# EAGLE board Proiect TSC v120 (EAGLE 9.7.0)
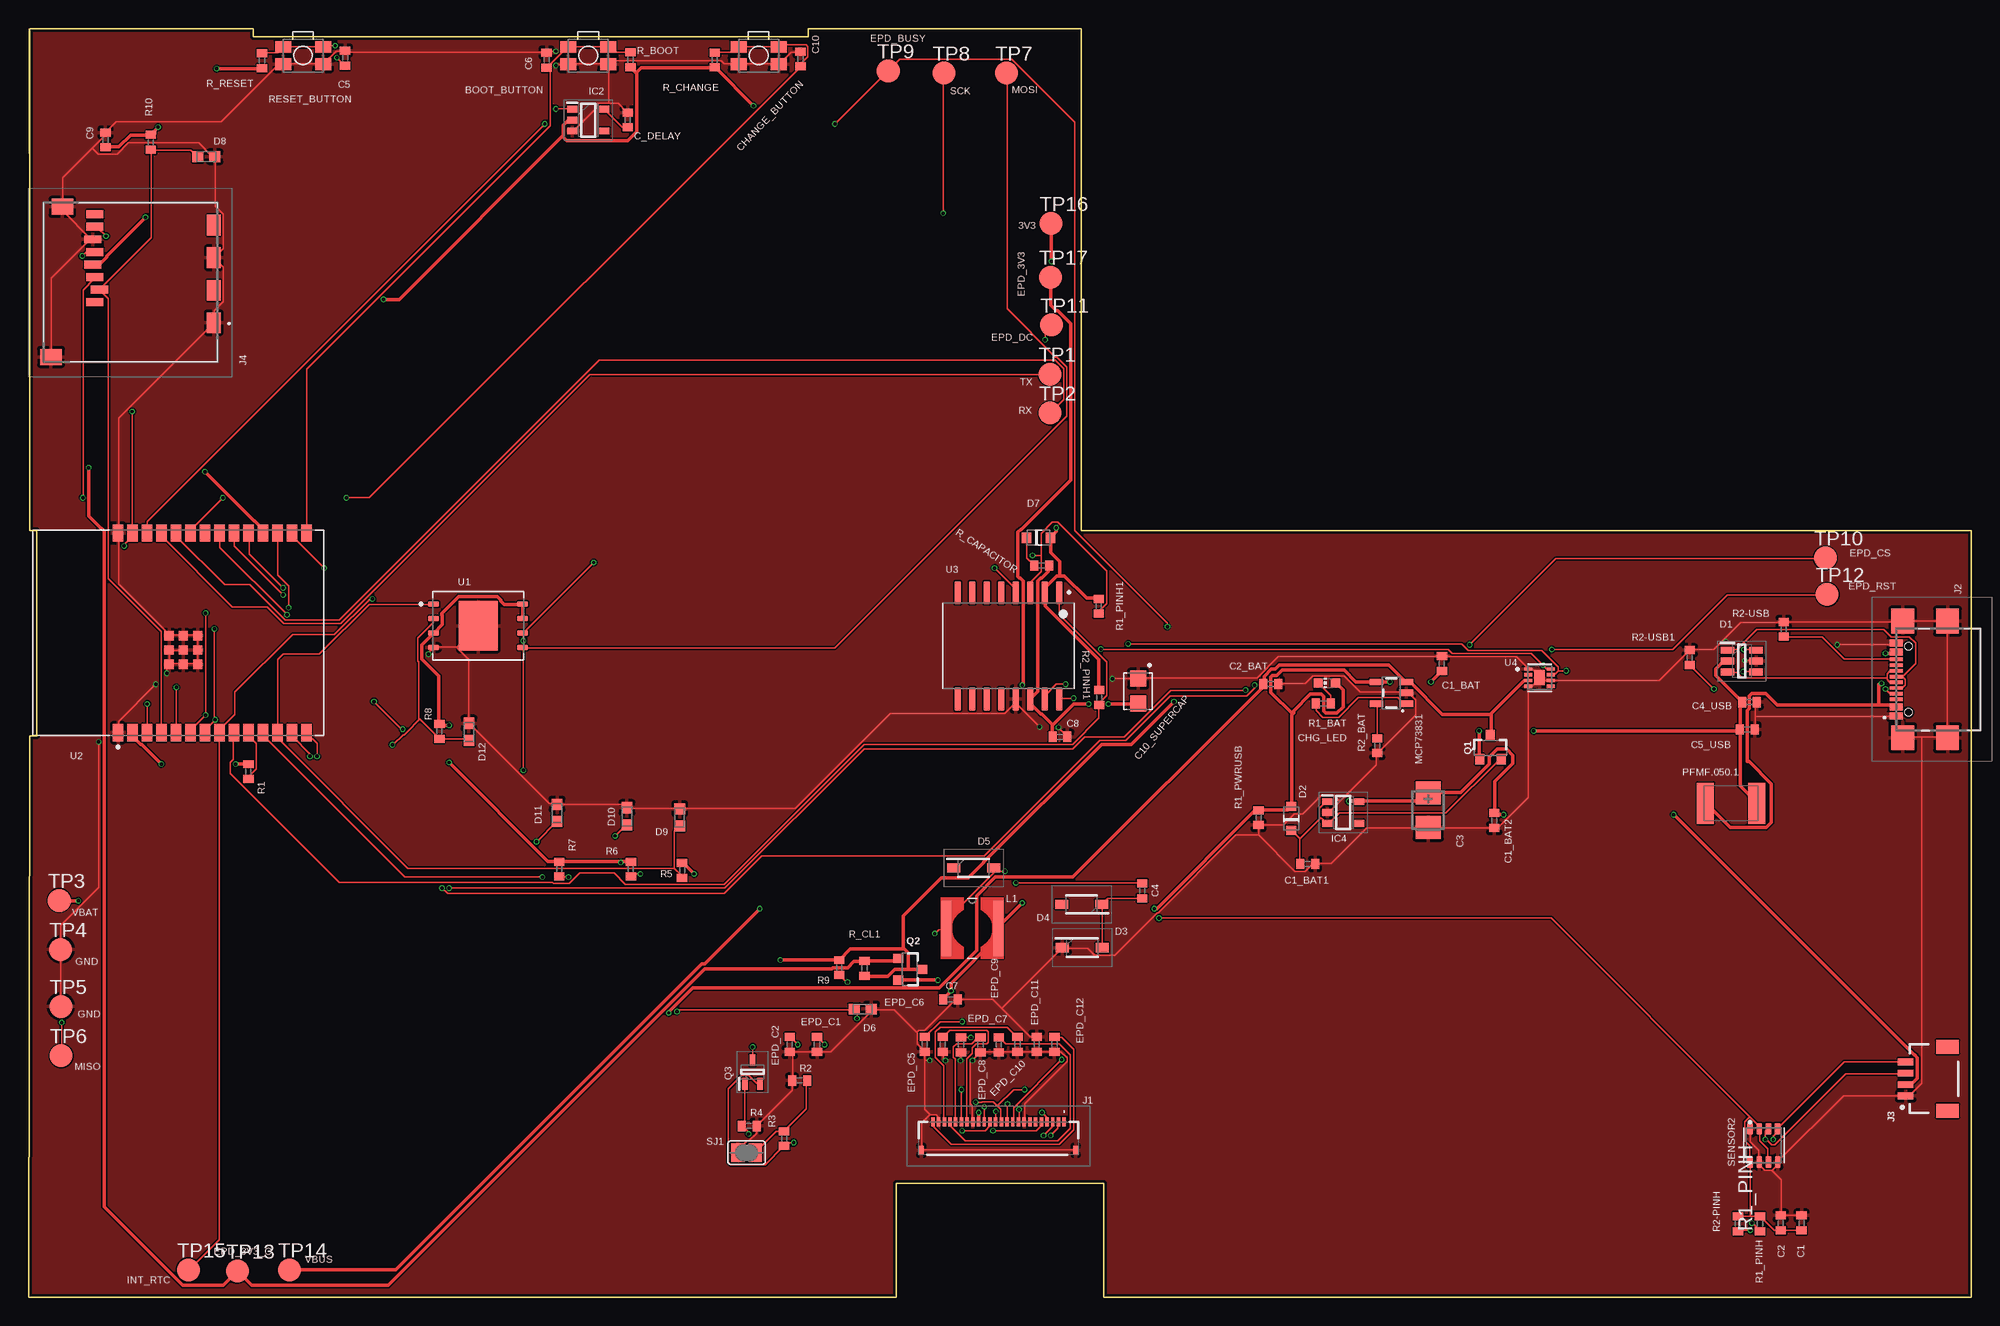
[diagram p0: board, top side]
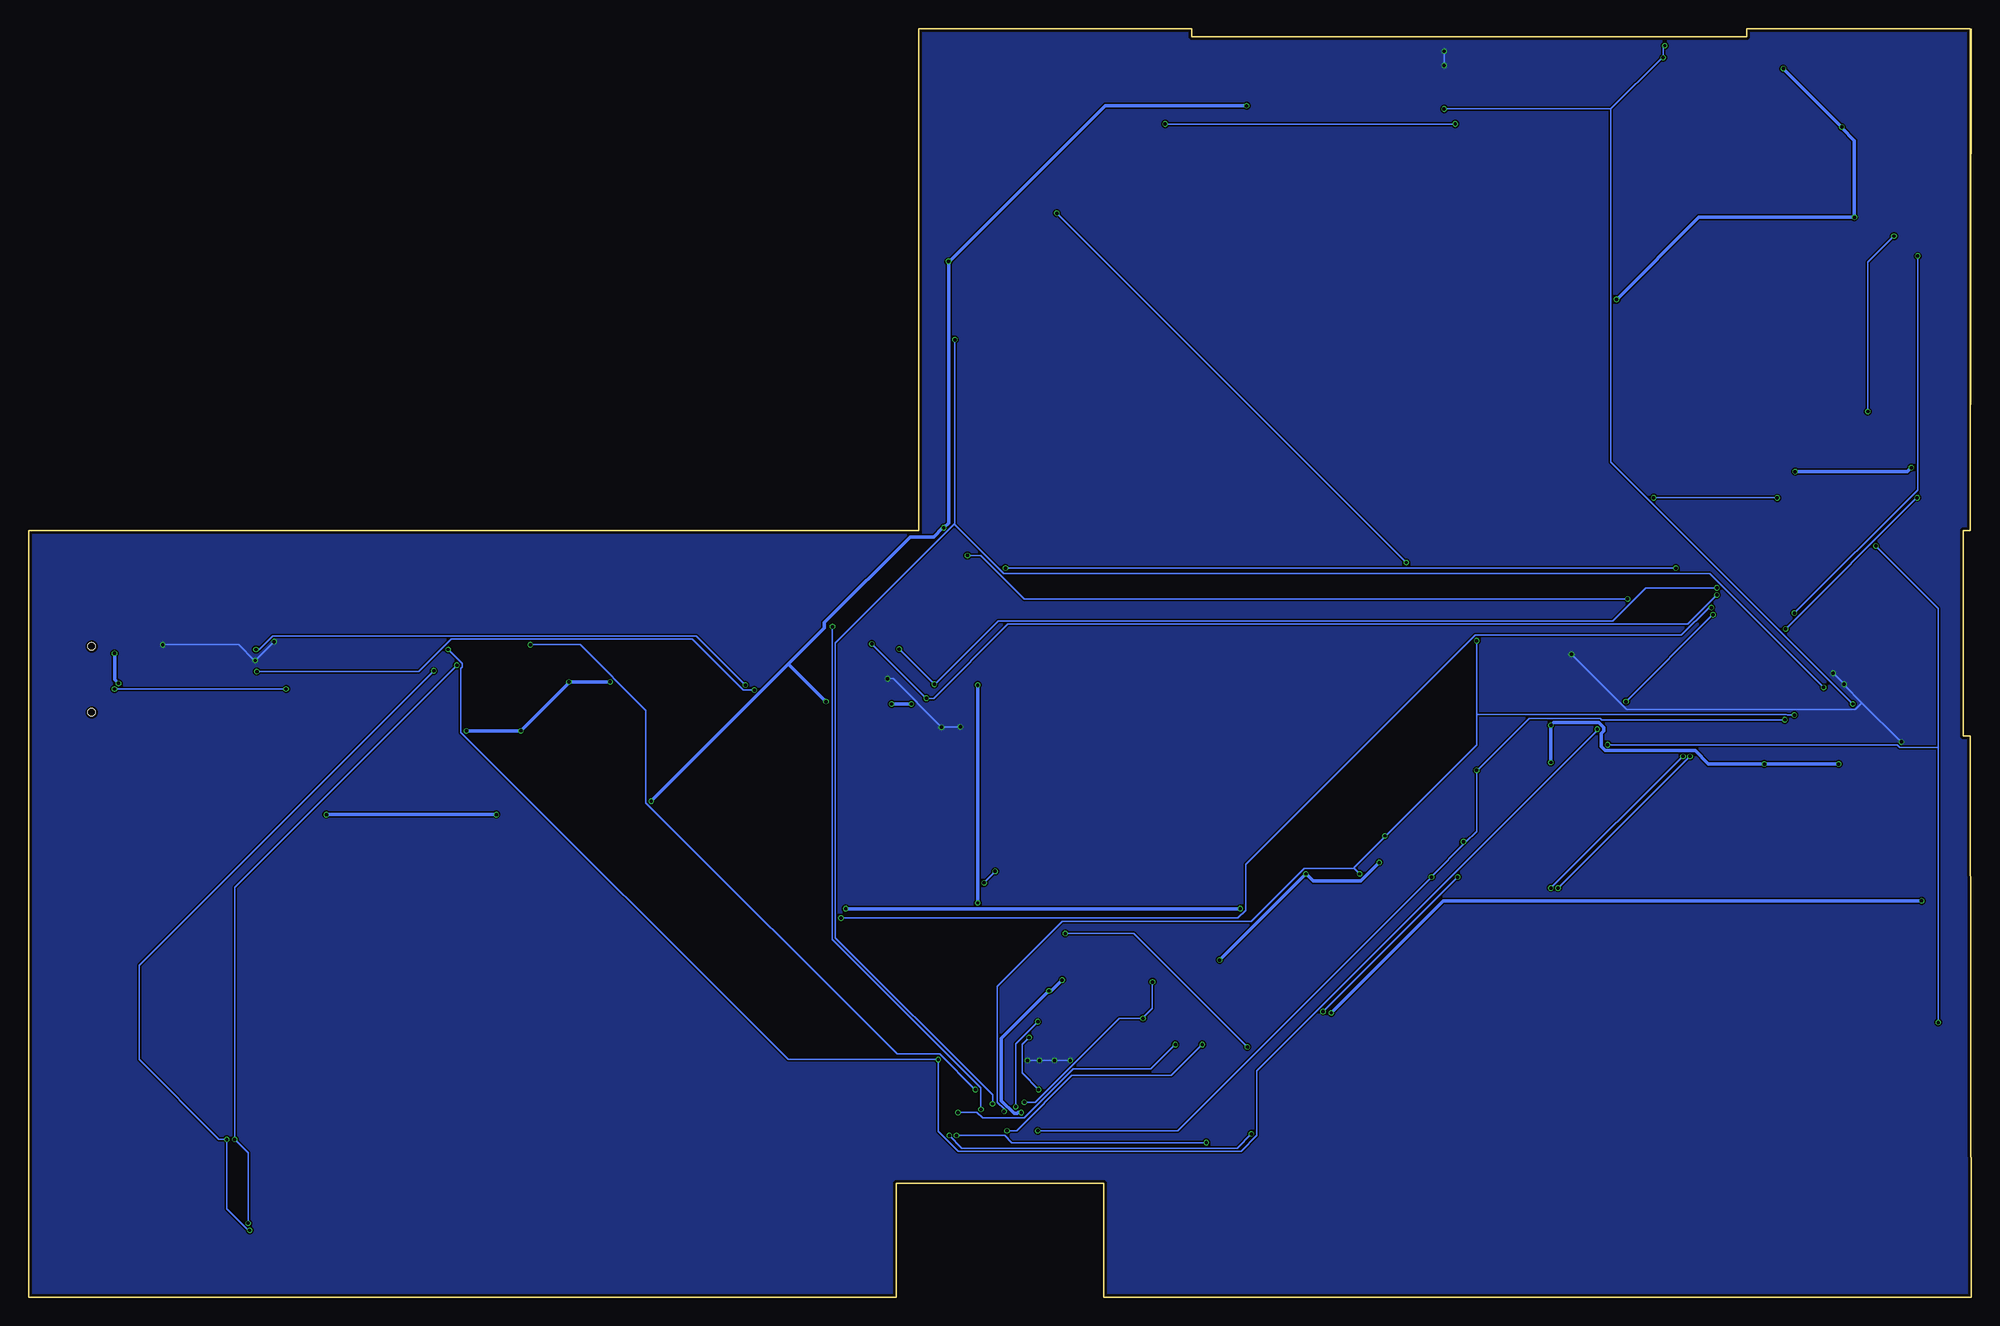
[diagram p1: board, bottom side, seen from below]

Size 170.2 x 111.2 mm. Coordinates in mm from the lower left corner, seen from the top.
Outline: 0,111.2 0.1,67.2
Outline: 0.1,67.2 0.7,67.2 0.7,49.21 0.1,49.21 0,0 76,0 76,10 94.2,10 94.2,0 170.2,0 170.2,67.2 92.2,67.2 92.2,111.2 68.3,111.2 68.3,110.5 19.7,110.5 19.7,111.2 0.1,111.2 0.1,67.2
Copper layers (1*16): Top 0.035mm / dielectric 1.6mm / Bottom 0.035mm
Design rules "jlcpcb-2layers.dru": minimum track width 0.15mm, minimum drill 0.3mm, track to track 5mil, track to pad 5mil, pad to pad 5mil, via to via 5mil, smd to smd 5mil, copper to edge 0.2mm, drill to drill 6mil, minimum pad ring 10mil, minimum via ring 3mil, stop-mask expansion 4mil, vias tented up to drill 0mil, thermal gap 10mil

## Footprints (pad centres in the part's own frame; a part is rotated, then mirrored left to right if it is on the bottom)
MYBUTTON = smd 1.4 x 1.05: 1 1.75,0.75; 2 -1.75,0.75; 3 -1.75,-0.75; 4 1.75,-0.75
EAGLE-LTSPICE_C0402 = smd 0.7 x 0.9: 1 -0.65,0; 2 0.65,0
RCL_CT3528 = smd 2 x 2.2: + -1.5,0; - 1.5,0
ESP32_WROVER_EAGLE-LTSPICE_C0402 = smd 0.7 x 0.9: 1 -0.65,0; 2 0.65,0
CAPCP3225X100N = smd 1.4 x 1.4: 1 -1.1,0; 2 1.1,0
ADAFRUIT_CHIP-LED0603 = smd 0.8 x 0.8: A 0,-0.75; C 0,0.75
SOT95P280X145-6N = smd 1.2 x 0.6: 1 -1.25,0.95; 2 -1.25,0; 3 -1.25,-0.95; 4 1.25,-0.95; 5 1.25,0; 6 1.25,0.95
ESP32_WROVER_AVX---SD0805S020S1R0_AVX_SD0805S020S1R0_0 = smd 0.8 x 0.9: 1 -1.05,0; 2 1.05,0
SOD3716X135N = smd 1.15 x 0.8: 1 -1.75,0; 2 1.75,0
DIOC1608X36N = smd 0.97 x 0.94: 1 -0.75,0; 2 0.75,0
SOT95P280X125-5N = smd 0.9 x 0.6: 1 -1.4,0.95; 2 -1.4,0; 3 -1.4,-0.95; 4 1.4,-0.95; 5 1.4,0.95
SOT95P280X120-5N = smd 0.9 x 0.6: 1 -1.4,0.95; 2 -1.4,0; 3 -1.4,-0.95; 4 1.4,-0.95; 5 1.4,0.95
FH34SRJ24S05SH99 = smd 0.3 x 0.8: 1 5.75,1.45; 2 5.25,1.45; 3 4.75,1.45; 4 4.25,1.45; 5 3.75,1.45; 6 3.25,1.45; 7 2.75,1.45; 8 2.25,1.45; 9 1.75,1.45; 10 1.25,1.45; 11 0.75,1.45; 12 0.25,1.45; 13 -0.25,1.45; 14 -0.75,1.45; 15 -1.25,1.45; 16 -1.75,1.45; 17 -2.25,1.45; 18 -2.75,1.45; 19 -3.25,1.45; 20 -3.75,1.45; 21 -4.25,1.45; 22 -4.75,1.45; 23 -5.25,1.45; 24 -5.75,1.45 | smd 0.4 x 0.8: MP1 6.75,-1.05; MP2 -6.75,-1.05
SAMACSYS_PARTS_USB4110GFA = smd 0.3 x 1.15: A1 -3.35,3.678; A4 -2.55,3.678; A5 -1.25,3.678; A6 -0.25,3.678; A7 0.25,3.678; A8 1.25,3.678; A9 2.55,3.678; A12 3.35,3.678; B1 3.05,3.678; B4 2.25,3.678; B5 1.75,3.678; B6 0.75,3.678; B7 -0.75,3.678; B8 -1.75,3.678; B9 -2.25,3.678; B12 -3.05,3.678 | smd 2.18 x 2: MP1 -5.11,-0.827; MP2 5.11,-0.827; MP3 -5.11,3.103; MP4 5.11,3.103 | hole 0.65: -2.89,2.603; 2.89,2.603
JST04_1MM_RA = smd 0.6 x 1.35: 1 -1.5,0; 2 -0.5,0; 3 0.5,0; 4 1.5,0 | smd 1.2 x 2: NC1 2.8,-3.675; NC2 -2.8,-3.675
112ATAARR03ATTEND = smd 1.8 x 1.2: G1 10.6,10.4; G2 4.9,10.4; S1 7.75,10.4; S2 2.05,10.4 | smd 1.4 x 1.9: G3 13.6,-3.85; G4 0.45,-2.85 | smd 0.7 x 1.5: P1 8.8,0; P2 7.7,0.4; P3 6.6,0; P4 5.5,-0.2; P5 4.4,0; P6 3.3,-0.2; P7 2.2,0; P8 1.1,0
IND_4828-WE-TPC_WRE = smd 0.889 x 4.826: 1 -2.286,0; 2 2.286,0
ESP32_WROVER_SPARKFUN-IC-POWER_SOT23-5 = smd 0.55 x 1.2: 1 -0.95,-1.3; 2 0,-1.3; 3 0.95,-1.3; 4 0.95,1.3; 5 -0.95,1.3
ESP32C6_VARISTOR_CT/CN1812 = smd 1.5 x 3.6: 1 -2.25,0; 2 2.25,0
ESP32_WROVER_SPARKFUN-DISCRETESEMI_SOT23-3 = smd 0.8 x 0.9: 1 -0.95,-1; 2 0.95,-1; 3 0,1.1
SOT65P210X110-3N = smd 1.05 x 0.5: 1 -1.05,0.65; 2 -1.05,-0.65; 3 1.05,0
ESP32_WROVER_EAGLE-LTSPICE_R0402 = smd 0.7 x 0.9: 1 -0.65,0; 2 0.65,0
ESP32_WROVER_BME680_PSON80P300X300X100-8N = smd 1.016 x 0.5: 1 1.458,1.2; 2 1.458,0.4; 3 1.458,-0.4; 4 1.458,-1.2; 5 -1.458,-1.22; 6 -1.458,-0.4; 7 -1.458,0.4; 8 -1.458,1.2
SJ = smd 1.168 x 1.6: 1 -0.762,0; 2 0.762,0
TP20R = smd 2 x 2: TP 0,0
SON127P600X800X80-9N = smd 0.94 x 0.44: 1 -3.895,1.905; 2 -3.895,0.635; 3 -3.895,-0.635; 4 -3.895,-1.905; 5 3.895,-1.905; 6 3.895,-0.635; 7 3.895,0.635; 8 3.895,1.905 | smd 3.4 x 4.3: 9 0,0
XCVR_ESP32-C6-WROOM-1-N8 = smd 1.5 x 0.9: 1 -8.75,5.26; 2 -8.75,3.99; 3 -8.75,2.72; 4 -8.75,1.45; 5 -8.75,0.18; 6 -8.75,-1.09; 7 -8.75,-2.36; 8 -8.75,-3.63; 9 -8.75,-4.9; 10 -8.75,-6.17; 11 -8.75,-7.44; 12 -8.75,-8.71; 13 -8.75,-9.98; 14 -8.75,-11.25; 15 8.75,-11.25; 16 8.75,-9.98; 17 8.75,-8.71; 18 8.75,-7.44; 19 8.75,-6.17; 20 8.75,-4.9; 21 8.75,-3.63; 22 8.75,-2.36; 23 8.75,-1.09; 24 8.75,0.18; 25 8.75,1.45; 26 8.75,2.72; 27 8.75,3.99; 28 8.75,5.26 | smd 0.8 x 0.8: 29_1 -2.755,0.79; 29_2 -1.505,0.79; 29_3 -0.255,0.79; 29_4 -2.755,-0.46; 29_5 -1.505,-0.46; 29_6 -0.255,-0.46; 29_7 -2.755,-1.71; 29_8 -1.505,-1.71; 29_9 -0.255,-1.71
SOIC127P1032X265-16N = smd 2.05 x 0.59: 1 -4.655,4.445; 2 -4.655,3.175; 3 -4.655,1.905; 4 -4.655,0.635; 5 -4.655,-0.635; 6 -4.655,-1.905; 7 -4.655,-3.175; 8 -4.655,-4.445; 9 4.655,-4.445; 10 4.655,-3.175; 11 4.655,-1.905; 12 4.655,-0.635; 13 4.655,0.635; 14 4.655,1.905; 15 4.655,3.175; 16 4.655,4.445
SON50P200X200X80-9N = smd 0.76 x 0.27: 1 -0.985,0.75; 2 -0.985,0.25; 3 -0.985,-0.25; 4 -0.985,-0.75; 5 0.985,-0.75; 6 0.985,-0.25; 7 0.985,0.25; 8 0.985,0.75 | smd 0.9 x 1.3: 9 0,0

## Placement (x,y rotation side)
BOOT_BUTTON  BUTTON_CUSYOMV1  [MYBUTTON]  49.03,108.83 180 top
C1  100nF  [EAGLE-LTSPICE_C0402]  155.32,6.53 90 top
C1_BAT  4.7uF  [EAGLE-LTSPICE_C0402]  123.81,55.55 90 top
C1_BAT1  4.7uF  [EAGLE-LTSPICE_C0402]  112.05,37.99 0 top
C1_BAT2  4.7uF  [EAGLE-LTSPICE_C0402]  128.39,41.79 90 top
C2  100nF  [EAGLE-LTSPICE_C0402]  153.5,6.53 90 top
C2_BAT  4.7uF  [EAGLE-LTSPICE_C0402]  108.82,53.75 0 top
C3  100uF TANT  [RCL_CT3528]  122.61,42.7 270 top
C4  4.7uF/25V  [EAGLE-LTSPICE_C0402]  97.56,35.64 90 top
C4_USB  100nF  [EAGLE-LTSPICE_C0402]  150.75,52.17 0 top
C5  1uF  [EAGLE-LTSPICE_C0402]  27.73,108.61 90 top
C5_USB  4.7uf  [EAGLE-LTSPICE_C0402]  150.56,49.77 0 top
C6  100nF  [EAGLE-LTSPICE_C0402]  45.38,108.43 90 top
C7  10uF  [EAGLE-LTSPICE_C0402]  80.77,26.13 0 top
C8  100nF  [EAGLE-LTSPICE_C0402]  90.36,49.13 0 top
C9  100nF  [ESP32_WROVER_EAGLE-LTSPICE_C0402]  6.74,101.43 90 top
C10  100nF  [EAGLE-LTSPICE_C0402]  67.62,108.53 90 top
C10_SUPERCAP  CPH3225A  [CAPCP3225X100N]  97.19,53.14 270 top
C_DELAY  100nF  [EAGLE-LTSPICE_C0402]  52.49,103.19 90 top
CHANGE_BUTTON  BUTTON_CUSYOMV1  [MYBUTTON]  63.96,108.83 180 top
CHG_LED  [ADAFRUIT_CHIP-LED0603]  113.74,53.85 90 top
D1  USBLC6-2SC6Y  [SOT95P280X145-6N]  150.08,55.77 0 top
D2  ESP32_WROVER_AVX---SD0805S020S1R0_AVX_SD0805S020S1R0_0_0AVX_SD0805S020S1R0_0_0  [ESP32_WROVER_AVX---SD0805S020S1R0_AVX_SD0805S020S1R0_0]  110.62,41.98 90 top
D3  MBR0530  [SOD3716X135N]  92.31,30.65 0 top
D4  MBR0530  [SOD3716X135N]  92.25,34.45 180 top
D5  MBR0530  [SOD3716X135N]  82.79,37.65 0 top
D6  PGB1010603MR  [DIOC1608X36N]  73.08,25.27 0 top
D7  ESP32_WROVER_AVX---SD0805S020S1R0_AVX_SD0805S020S1R0_0_0AVX_SD0805S020S1R0_0_0  [ESP32_WROVER_AVX---SD0805S020S1R0_AVX_SD0805S020S1R0_0]  88.47,66.58 0 top
D8  PGB1010603MR  [DIOC1608X36N]  15.56,99.97 0 top
D9  PGB1010603MR  [DIOC1608X36N]  57.04,42.07 90 top
D10  PGB1010603MR  [DIOC1608X36N]  52.42,42.17 90 top
D11  PGB1010603MR  [DIOC1608X36N]  46.3,42.47 90 top
D12  PGB1010603MR  [DIOC1608X36N]  38.58,49.57 90 top
EPD_C1  1uF/50V  [EAGLE-LTSPICE_C0402]  69.07,22.17 90 top
EPD_C2  1uF/50V  [EAGLE-LTSPICE_C0402]  66.68,22.17 90 top
EPD_C5  0.1uF/50V  [EAGLE-LTSPICE_C0402]  78.51,22.19 90 top
EPD_C6  1uF/50V  [EAGLE-LTSPICE_C0402]  80.09,22.17 90 top
EPD_C7  1uF/50V  [EAGLE-LTSPICE_C0402]  81.68,22.15 90 top
EPD_C8  1uF/50V  [EAGLE-LTSPICE_C0402]  83.39,22.15 90 top
EPD_C9  1uF/50V  [EAGLE-LTSPICE_C0402]  85,22.15 90 top
EPD_C10  1uF/50V  [EAGLE-LTSPICE_C0402]  86.63,22.19 90 top
EPD_C11  1uF/50V  [EAGLE-LTSPICE_C0402]  88.31,22.19 90 top
EPD_C12  1uF/50V  [EAGLE-LTSPICE_C0402]  89.87,22.19 90 top
IC2  BD5229G-TR  [SOT95P280X125-5N]  49.03,103.18 0 top
IC4  XC6220A331MR-G  [SOT95P280X120-5N]  115.17,42.49 0 top
J1  FH34SRJ-24S-0.5SH_99_  [FH34SRJ24S05SH99]  84.97,13.94 0 top
J2  SAMACSYS_PARTS_USB4110-GF-A  [SAMACSYS_PARTS_USB4110GFA]  167.28,54.16 90 top
J3  QWIIC_RIGHT_ANGLE  [JST04_1MM_RA]  164.43,19.16 90 top
J4  112A-TAAR-R03_ATTEND  [112ATAARR03ATTEND]  5.82,96.02 270 top
L1  68uH  [IND_4828-WE-TPC_WRE]  82.67,32.35 0 top
MCP73831  ESP32_WROVER_SPARKFUN-IC-POWER_MCP73831  [ESP32_WROVER_SPARKFUN-IC-POWER_SOT23-5]  119.38,52.99 90 top
PFMF.050.1  ESP32C6_VARISTORCN1812  [ESP32C6_VARISTOR_CT/CN1812]  149.14,43.3 0 top
Q1  20V/4.2A/52mΩ/1.4W  [ESP32_WROVER_SPARKFUN-DISCRETESEMI_SOT23-3]  128.06,48.16 0 top
Q2  20V/4.2A/52mΩ/1.4W  [ESP32_WROVER_SPARKFUN-DISCRETESEMI_SOT23-3]  77.18,28.76 270 top
Q3  SI1308EDL-T1-GE3  [SOT65P210X110-3N]  63.42,19.75 90 top
R1  10K  [ESP32_WROVER_EAGLE-LTSPICE_R0402]  19.26,46.08 90 top
R1_BAT  200  [ESP32_WROVER_EAGLE-LTSPICE_R0402]  113.43,52.05 0 top
R1_PINH  10K  [ESP32_WROVER_EAGLE-LTSPICE_R0402]  151.68,6.47 90 top
R1_PINH1  10K  [ESP32_WROVER_EAGLE-LTSPICE_R0402]  93.75,60.57 90 top
R1_PWRUSB  100K  [ESP32_WROVER_EAGLE-LTSPICE_R0402]  107.75,42.04 90 top
R2  2.2  [ESP32_WROVER_EAGLE-LTSPICE_R0402]  67.55,19.01 0 top
R2-PINH  10K  [ESP32_WROVER_EAGLE-LTSPICE_R0402]  149.74,6.47 90 top
R2-USB  5k1  [ESP32_WROVER_EAGLE-LTSPICE_R0402]  153.75,58.55 90 top
R2-USB1  5k1  [ESP32_WROVER_EAGLE-LTSPICE_R0402]  145.52,56.07 90 top
R2_BAT  2K  [ESP32_WROVER_EAGLE-LTSPICE_R0402]  118.14,48.35 90 top
R2_PINH1  10K  [ESP32_WROVER_EAGLE-LTSPICE_R0402]  93.79,52.57 90 top
R3  0.47  [ESP32_WROVER_EAGLE-LTSPICE_R0402]  66.19,13.93 90 top
R4  10K  [ESP32_WROVER_EAGLE-LTSPICE_R0402]  63.13,15.03 0 top
R5  10K  [ESP32_WROVER_EAGLE-LTSPICE_R0402]  57.25,37.43 90 top
R6  10K  [ESP32_WROVER_EAGLE-LTSPICE_R0402]  52.77,37.53 90 top
R7  10K  [ESP32_WROVER_EAGLE-LTSPICE_R0402]  46.49,37.53 90 top
R8  10K  [ESP32_WROVER_EAGLE-LTSPICE_R0402]  35.99,49.61 90 top
R9  10K  [ESP32_WROVER_EAGLE-LTSPICE_R0402]  71.01,28.91 90 top
R10  10K  [ESP32_WROVER_EAGLE-LTSPICE_R0402]  10.71,101.23 89.5 top
R_BOOT  10K  [ESP32_WROVER_EAGLE-LTSPICE_R0402]  52.73,108.47 90 top
R_CAPACITOR  15  [ESP32_WROVER_EAGLE-LTSPICE_R0402]  88.75,64.14 0 top
R_CHANGE  10K  [ESP32_WROVER_EAGLE-LTSPICE_R0402]  60.12,108.44 90 top
R_CL1  10K  [ESP32_WROVER_EAGLE-LTSPICE_R0402]  73.23,28.85 90 top
R_RESET  10K  [ESP32_WROVER_EAGLE-LTSPICE_R0402]  20.45,108.39 90 top
RESET_BUTTON  BUTTON_CUSYOMV1  [MYBUTTON]  24.05,108.83 180 top
SENSOR2  BME688  [ESP32_WROVER_BME680_PSON80P300X300X100-8N]  152.01,13.32 90 top
SJ1  [SJ]  62.9,12.69 0 top
TP1  TPTP20R  [TP20R]  89.47,80.91 0 top
TP2  TPTP20R  [TP20R]  89.49,77.51 0 top
TP3  TPTP20R  [TP20R]  2.69,34.79 0 top
TP4  TPTP20R  [TP20R]  2.81,30.49 0 top
TP5  TPTP20R  [TP20R]  2.83,25.49 0 top
TP6  TPTP20R  [TP20R]  2.85,21.19 0 top
TP7  TPTP20R  [TP20R]  85.67,107.29 0 top
TP8  TPTP20R  [TP20R]  80.19,107.29 0 top
TP9  TPTP20R  [TP20R]  75.31,107.49 0 top
TP10  TPTP20R  [TP20R]  157.4,64.81 0 top
TP11  TPTP20R  [TP20R]  89.61,85.21 0 top
TP12  TPTP20R  [TP20R]  157.55,61.61 0 top
TP13  TPTP20R  [TP20R]  18.3,2.31 0 top
TP14  TPTP20R  [TP20R]  22.85,2.42 0 top
TP15  TPTP20R  [TP20R]  14,2.41 0 top
TP16  TPTP20R  [TP20R]  89.55,94.11 0 top
TP17  TPTP20R  [TP20R]  89.51,89.41 0 top
U1  W25Q512JVEIQ  [SON127P600X800X80-9N]  39.39,58.86 0 top
U2  ESP32-C6-WROOM-1-N8  [XCVR_ESP32-C6-WROOM-1-N8]  13.1,58.24 90 top
U3  DS3231SN#  [SOIC127P1032X265-16N]  85.85,57.1 270 top
U4  MAX17048G+T10  [SON50P200X200X80-9N]  132.37,54.32 0 top

## Library data of the parts
BOOT_BUTTON CHANGE_BUTTON CHG_LED PFMF.050.1 RESET_BUTTON SJ1 TP1-TP17 = DeskAssistant v19 v1
C1 C1_BAT C1_BAT1 C1_BAT2 C2 C2_BAT C4 C4_USB C5 C5_USB C6-C10 C_DELAY EPD_C1 EPD_C2 EPD_C5-EPD_C12 = DeskAssistant v19 v1; SPICEMODEL: NONE; SPICEPREFIX: C
C3 = DeskAssistant v19 v1; SPICEPREFIX: C
C10_SUPERCAP = DeskAssistant v19 v1; AVAILABILITY: Not in stock; CHECK_PRICES: https://www.snapeda.com/parts/CPH3225A/Seiko+Instruments/view-part/?ref=eda; DESCRIPTION: 11 mF (EDLC) Supercapacitor 3.3 V 1210 (3225 Metric) - -; MF: Seiko Instruments; MP: CPH3225A; PACKAGE: 1210 Seiko; PRICE: None; PURCHASE-URL: https://www.snapeda.com/api/url_track_click_mouser/?unipart_id=562593&manufacturer=Seiko Instruments&part_name=CPH3225A&search_term=None; SNAPEDA_LINK: https://www.snapeda.com/parts/CPH3225A/Seiko+Instruments/view-part/?ref=snap
D1 = DeskAssistant v19 v1; AVAILABILITY: In Stock; CHECK_PRICES: https://www.snapeda.com/parts/USBLC6-2SC6Y/STMicroelectronics/view-part/?ref=eda; DESCRIPTION: 17V Clamp 5A (8/20µs) Ipp Tvs Diode Surface Mount SOT-23-6; MF: STMicroelectronics; MP: USBLC6-2SC6Y; PACKAGE: SOT-23-6 STMicroelectronics; PRICE: None; SNAPEDA_LINK: https://www.snapeda.com/parts/USBLC6-2SC6Y/STMicroelectronics/view-part/?ref=snap
D2 D7 = DeskAssistant v19 v1; CENTROID_NOT_SPECIFIED: No; DATASHEET: http://datasheets.avx.com/schottky.pdf; DIGIKEY_DESCRIPTION: DIODE SCHOTTKY 20V 1A 0805; DIGIKEY_PART_NUMBER: 478-7800-1-ND; LEAD_FREE: yes; MF: AVX; MOUSER_PART_NUMBER: 581-SD0805S020S1R0; PACKAGE: 0805 (2012 metric); PREFIX: D; ROHS: yes; TEMPERATURE_RANGE_HIGH: +125°C; TEMPERATURE_RANGE_LOW: -55°C
D3-D5 = DeskAssistant v19 v1; AVAILABILITY: In Stock; CHECK_PRICES: https://www.snapeda.com/parts/MBR0530/Onsemi/view-part/?ref=eda; DESCRIPTION: Diode Schottky 30 V 500mA Surface Mount SOD-123; MF: ON Semiconductor; MP: MBR0530; PACKAGE: SOD-123-2 ON Semiconductor; PRICE: None; PURCHASE-URL: https://www.snapeda.com/api/url_track_click_mouser/?unipart_id=179458&manufacturer=ON Semiconductor&part_name=MBR0530&search_term=None; SNAPEDA_LINK: https://www.snapeda.com/parts/MBR0530/Onsemi/view-part/?ref=snap
D6 D8-D12 = DeskAssistant v19 v1; AVAILABILITY: In Stock; CHECK_PRICES: https://www.snapeda.com/parts/PGB1010603MR/Littelfuse/view-part/?ref=eda; DESCRIPTION: 150V (Typ) Clamp - Ipp Tvs Diode Surface Mount 0603 (1608 Metric); MF: Littelfuse Inc.; MP: PGB1010603MR; PACKAGE: 0603 Littelfuse Inc.; PRICE: None; PURCHASE-URL: https://www.snapeda.com/api/url_track_click_mouser/?unipart_id=5659453&manufacturer=Littelfuse Inc.&part_name=PGB1010603MR&search_term=None; SNAPEDA_LINK: https://www.snapeda.com/parts/PGB1010603MR/Littelfuse/view-part/?ref=snap
IC2 = DeskAssistant v19 v1; DESCRIPTION: Voltage Detector with Adjustable Delay Time: CMOS processes are utilized to develop high precision, low current consumption CMOS reset ICs that allow arbitrary setting of the delay time. The extensive lineup includes both Nch Open Drain and CMOS output types in a wide range of detection voltages (from 2.3V to 6.0V, in 0.1V steps), enabling selection of the ideal solution based on customer requirements. In addition, the entire series is of course both lead-free and RoHS-compliant.; HEIGHT: 1.25mm; MANUFACTURER_NAME: ROHM Semiconductor; MANUFACTURER_PART_NUMBER: BD5229G-TR; MOUSER_PART_NUMBER: 755-BD5229G-TR; MOUSER_PRICE-STOCK: https://www.mouser.co.uk/ProductDetail/ROHM-Semiconductor/BD5229G-TR?qs=4kLU8WoGk0vvnhrrYwdszw%3D%3D
IC4 = DeskAssistant v19 v1; DESCRIPTION: LDO Voltage Regulators; HEIGHT: 1.2mm; MANUFACTURER_NAME: Torex; MANUFACTURER_PART_NUMBER: XC6220A331MR-G; MOUSER_PART_NUMBER: 865-XC6220A331MR-G; MOUSER_PRICE-STOCK: https://www.mouser.co.uk/ProductDetail/Torex-Semiconductor/XC6220A331MR-G?qs=AsjdqWjXhJ8ZSWznL1J0gg%3D%3D
J1 = DeskAssistant v19 v1; DESCRIPTION: 24 Position FFC, FPC Connector Contacts, Top and Bottom 0.020" (0.50mm) Surface Mount, Right Angle; HEIGHT: 1.1mm; MANUFACTURER_NAME: Hirose; MANUFACTURER_PART_NUMBER: FH34SRJ-24S-0.5SH(99); MOUSER_PART_NUMBER: 798-FH34SRJ24S05SH99; MOUSER_PRICE-STOCK: https://www.mouser.co.uk/ProductDetail/Hirose-Connector/FH34SRJ-24S-0.5SH99?qs=vcbW%252B4%252BSTIpKBl5ap9J8Fw%3D%3D
J2 = DeskAssistant v19 v1; DESCRIPTION: CONN USB 2.0 TYPE-C R/A SMT; HEIGHT: 3.26mm; MANUFACTURER_NAME: GCT (GLOBAL CONNECTOR TECHNOLOGY); MANUFACTURER_PART_NUMBER: USB4110-GF-A; MOUSER_PART_NUMBER: 640-USB4110-GF-A; MOUSER_PRICE-STOCK: https://www.mouser.co.uk/ProductDetail/GCT/USB4110-GF-A?qs=KUoIvG%2F9IlYiZvIXQjyJeA%3D%3D
J3 = DeskAssistant v19 v1; PROD_ID: CONN-13694
J4 = DeskAssistant v19 v1; DESCRIPTION: Micro SD Card Socket, Push-Push Type, Top Mount, SMT, H=1.83mm, 10u; HEIGHT: 1.9mm; MANUFACTURER_NAME: ATTEND; MANUFACTURER_PART_NUMBER: 112A-TAAR-R03 ATTEND
L1 = DeskAssistant v19 v1; COPYRIGHT: Copyright (C) 2024 Ultra Librarian. All rights reserved.; MANUFACTURER_PART_NUMBER: 744043680; MFR_NAME: Wurth Electronics
MCP73831 = DeskAssistant v19 v1; PROD_ID: IC-09995
Q1 Q2 = DeskAssistant v19 v1; PROD_ID: TRAN-14388
Q3 = DeskAssistant v19 v1; AVAILABILITY: In Stock; CHECK_PRICES: https://www.snapeda.com/parts/SI1308EDL-T1-GE3/Vishay+Siliconix/view-part/?ref=eda; DESCRIPTION: Si1308EDL-T1-GE3 N-channel MOSFET Transistor, 1.5 A, 30 V, 3-Pin SC-70 | Siliconix / Vishay SI1308EDL-T1-GE3; MF: Vishay Siliconix; MP: SI1308EDL-T1-GE3; PACKAGE: SOT-323 Vishay Semiconductor; PRICE: None; PURCHASE-URL: https://www.snapeda.com/api/url_track_click_mouser/?unipart_id=274603&manufacturer=Vishay Siliconix&part_name=SI1308EDL-T1-GE3&search_term=None; SNAPEDA_LINK: https://www.snapeda.com/parts/SI1308EDL-T1-GE3/Vishay+Siliconix/view-part/?ref=snap
R1 R1_BAT R1_PINH R1_PINH1 R1_PWRUSB R2 R2-PINH R2-USB R2-USB1 R2_BAT R2_PINH1 R3-R10 R_BOOT R_CAPACITOR R_CHANGE R_CL1 R_RESET = DeskAssistant v19 v1; SPICEMODEL: NONE; SPICEPREFIX: R
SENSOR2 = DeskAssistant v19 v1; AVAILABILITY: Unavailable; DESCRIPTION: Integrated Environmental Unit; MF: Bosch Sensortec; MP: BME680; PACKAGE: LGA-8 Bosch Tools; PRICE: None
U1 = DeskAssistant v19 v1; AVAILABILITY: In Stock; CHECK_PRICES: https://www.snapeda.com/parts/W25Q512JVEIQ/Winbond+Electronics/view-part/?ref=eda; DESCRIPTION: FLASH - NOR Memory IC 512Mb (64M x 8) SPI - Quad I/O 133 MHz 8-WSON (8x6); MF: Winbond Electronics; MP: W25Q512JVEIQ; PACKAGE: Package; PRICE: None; SNAPEDA_LINK: https://www.snapeda.com/parts/W25Q512JVEIQ/Winbond+Electronics/view-part/?ref=snap
U2 = DeskAssistant v19 v1; AVAILABILITY: In Stock; CHECK_PRICES: https://www.snapeda.com/parts/ESP32-C6-WROOM-1-N8/Espressif+Systems/view-part/?ref=eda; DESCRIPTION: Multiprotocol Modules ESP32-C6 module, Wi-Fi 6 in 2.4 GHz band, Bluetooth 5, Zigbee 3.0 and Thread. ESP34-WROOM Compatible - ENGINEERING SAMPLE; MF: Espressif Systems; MP: ESP32-C6-WROOM-1-N8; PACKAGE: None; PRICE: None; SNAPEDA_LINK: https://www.snapeda.com/parts/ESP32-C6-WROOM-1-N8/Espressif+Systems/view-part/?ref=snap
U3 = DeskAssistant v19 v1; AVAILABILITY: In Stock; CHECK_PRICES: https://www.snapeda.com/parts/DS3231SN%23/Analog+Devices/view-part/?ref=eda; DESCRIPTION: Extremely Accurate I²C-Integrated RTC/TCXO/Crystal; MF: Analog Devices; MP: DS3231SN#; PACKAGE: SOIC-16 Maxim; PRICE: None; PURCHASE-URL: https://www.snapeda.com/api/url_track_click_mouser/?unipart_id=99048&manufacturer=Analog Devices&part_name=DS3231SN#&search_term=None; SNAPEDA_LINK: https://www.snapeda.com/parts/DS3231SN%23/Analog+Devices/view-part/?ref=snap
U4 = DeskAssistant v19 v1; AVAILABILITY: In Stock; CHECK_PRICES: https://www.snapeda.com/parts/MAX17048G+T10/Analog+Devices/view-part/?ref=eda; DESCRIPTION: 3µA 1-Cell/2-Cell Fuel Gauge with ModelGauge; MF: Analog Devices; MP: MAX17048G+T10; PACKAGE: TDFN-8 Maxim; PRICE: None; PURCHASE-URL: https://www.snapeda.com/api/url_track_click_mouser/?unipart_id=329239&manufacturer=Analog Devices&part_name=MAX17048G+T10&search_term=None; SNAPEDA_LINK: https://www.snapeda.com/parts/MAX17048G+T10/Analog+Devices/view-part/?ref=snap

## Nets
3V3: C1_BAT2.2 C3.+ C9.1 D7.2 IC2.2 IC4.5 J3.2 J4.P4 Q2.3 R1.2 R1_PINH1.2 R2_PINH1.2 R5.2 R6.2 R7.2 R8.2 R9.2 R10.2 R_BOOT.1 R_CHANGE.1 R_CL1.1 R_RESET.1 TP16.TP U1.3 U1.7 U1.8 U2.2 U3.2
32KHZ: R2_PINH1.1 U2.9 U3.1
DN: D1.1 J2.A7 J2.B7
DP: D1.3 J2.A6 J2.B6
EPD_3V3: C7.1 J1.16 L1.2 Q2.2 TP17.TP
EPD_3V3_C: Q2.1 R_CL1.2 TP13.TP U2.18
EPD_BUSY: J1.9 TP9.TP U2.26
EPD_CS: D6.1 J1.12 R9.1 TP10.TP U2.11
EPD_DC: J1.11 TP11.TP U2.5
EPD_RST: J1.10 TP12.TP U2.21
FLASH_CS: D9.1 R5.1 U1.1 U2.12
GDR: J1.2 Q3.1 R4.1
GND: BOOT_BUTTON.1 BOOT_BUTTON.2 C1.2 C1_BAT1.2 C1_BAT2.1 C1_BAT.2 C2.2 C2_BAT.2 C3.- C4_USB.2 C5.2 C5_USB.2 C6.2 C7.2 C8.2 C9.2 C10.2 C10_SUPERCAP.1 C_DELAY.2 CHANGE_BUTTON.1 CHANGE_BUTTON.2 D1.5 D3.1 D6.2 D8.2 D9.2 D10.2 D11.2 D12.2 EPD_C1.1 EPD_C2.1 EPD_C5.1 EPD_C6.1 EPD_C7.1 EPD_C8.1 EPD_C9.1 EPD_C10.1 EPD_C11.1 EPD_C11.2 EPD_C12.1 IC2.3 IC4.2 J1.8 J1.17 J1.23 J1.MP1 J1.MP2 J2.A1 J2.A12 J2.B1 J2.B12 J2.MP1 J2.MP2 J2.MP3 J2.MP4 J3.1 J4.G1 J4.G2 J4.G3 J4.G4 J4.P6 MCP73831.2 R1_PWRUSB.1 R2-USB1.2 R2-USB.2 R2.1 R2_BAT.1 R4.2 RESET_BUTTON.1 RESET_BUTTON.2 SENSOR2.1 SENSOR2.5 SENSOR2.7 SJ1.1 TP4.TP TP5.TP U1.4 U1.9 U2.1 U2.28 U2.29_1 U2.29_2 U2.29_3 U2.29_4 U2.29_5 U2.29_6 U2.29_7 U2.29_8 U2.29_9 U3.13 U4.1 U4.4 U4.6 U4.9
GPIO8: R1.1 U2.10
I2C_PW: C1.1 C2.1 R1_PINH.2 R2-PINH.2 SENSOR2.2 SENSOR2.6 SENSOR2.8 U2.17
INT_RTC: R1_PINH1.1 TP15.TP U2.8 U3.3
IO/BOOT: BOOT_BUTTON.3 BOOT_BUTTON.4 C6.1 R_BOOT.2 U2.15
IO/CHANGE: C10.1 CHANGE_BUTTON.3 CHANGE_BUTTON.4 R_CHANGE.2 U2.23
MISO: D12.1 J4.P7 R8.1 TP6.TP U1.2 U2.27
MOSI: D11.1 J1.14 J4.P3 R7.1 TP7.TP U1.5 U2.7
N$1: J2.B5 R2-USB.1
N$2: J2.A5 R2-USB1.1
N$3: C1_BAT1.1 D2.1 IC4.1 IC4.3 Q1.2
N$4: MCP73831.1 R1_BAT.1
N$5: C4.1 D3.2 D4.1
N$6: CHG_LED.C R1_BAT.2
N$7: MCP73831.5 R2_BAT.2
N$8: EPD_C1.2 J1.4
N$9: EPD_C2.2 J1.5
N$10: EPD_C5.2 J1.15
N$11: EPD_C6.2 J1.18
N$12: EPD_C7.2 J1.19
N$13: EPD_C8.2 J1.20
N$14: EPD_C9.2 J1.21
N$15: EPD_C10.2 J1.22
N$16: C_DELAY.1 IC2.5
N$17: D7.1 R_CAPACITOR.1
N$18: EPD_C12.2 J1.24
PREVGH: D5.1
PREVGL: D4.2
RESE: J1.3 Q3.2 R3.1
RESE`: R2.2 R3.2 SJ1.2
RESET: C5.1 IC2.1 R_RESET.2 RESET_BUTTON.3 RESET_BUTTON.4 U2.3
RTC_RST: U2.16 U3.4
RX: TP2.TP U2.24
SCK: D10.1 J1.13 J4.P5 R6.1 TP8.TP U1.6 U2.6
SCL: J3.4 R2-PINH.1 SENSOR2.4 U2.20 U3.16 U4.7
SDA: J3.3 R1_PINH.1 SENSOR2.3 U2.19 U3.15 U4.8
SRC: C4.2 D5.2 L1.1 Q3.3
SS_SD: D8.1 J4.P2 R10.1 U2.4
TX: TP1.TP U2.25
USB_D+: D1.4 U2.14
USB_D-: D1.6 U2.13
VBAT: C2_BAT.1 MCP73831.3 Q1.3 TP3.TP U4.2 U4.3
VBUS: C1_BAT.1 C4_USB.1 C5_USB.1 CHG_LED.A D1.2 D2.2 MCP73831.4 PFMF.050.1.2 Q1.1 R1_PWRUSB.2 TP14.TP
VRTC: C8.1 C10_SUPERCAP.2 R_CAPACITOR.2 U3.14
VUSB: J2.A4 J2.A9 J2.B4 J2.B9 PFMF.050.1.1

## Tracks (layer width: path | path; a pad name or v marks a point on that pad's centre or on a via)
3V3  (via drill 0.3)
  Top 0.15: 78.25,28.74 Q2.3 | 70.98,29.57 R9.2 | 19.25,46.74 R1.2 | 43.28,60.73 U1.8 43.21,60.73 | 35.94,50.28 R8.2 36.01,50.21 36.08,50.14 | 46.47,38.23 R7.2 | 116.62,43.49 IC4.5 116.55,43.49 | 122.57,44.18 C3.+ 122.64,44.25 | 10.66,101.87 R10.2 | 46.85,101.67 46.85,101.84 | 60.11,107.75 R_CHANGE.1 | 53.25,107.34 53.18,107.34 | 89.06,61.7 U3.2 89.06,61.77 | 89.54,66.55 D7.2 89.54,66.62
  Top 0.3: v51.88,38.11 51.88,38.23
  Top 0.305: R_CL1.1 73.28,28.15 75.28,28.15 75.86,28.74 77.07,28.74 | 78.25,28.74 77.07,28.74 | 76.73,30.53 76.63,30.63 76.63,33.44 79.94,36.75 82.31,36.75 83.69,38.12 83.69,38.17 94,48.48 96.6,48.48 v100.34,52.22 | 76.73,30.53 77.07,30.19 77.07,28.74 | R7.2 46.54,38.23 51.88,38.23 52.77,38.23 R6.2 | v65.86,29.57 70.98,29.57 | v58.31,37.12 57.34,38.09 R5.2 | v18.14,46.74 19.25,46.74 | U2.2 9.14,49.44 9.14,49.13 9.81,48.46 9.91,48.46 v11.63,46.74 | 43.28,60.73 43.28,59.55 U1.7 | 35.94,50.28 35.94,54.45 34.46,55.93 34.46,57.17 35.46,58.17 U1.3 35.52,58.24 36.24,58.96 36.24,59.8 36.22,59.83 36.22,59.93 37.7,61.42 41.08,61.42 41.37,61.13 41.37,61.05 41.69,60.73 43.21,60.73 | 36.08,50.14 v36.84,50.14 | 46.47,38.23 45.5,38.23 v36.84,46.88 | 116.62,43.49 121.88,43.49 122.57,44.18 | 122.64,44.25 125.45,44.25 127.97,46.77 127.97,47.36 128.66,48.05 129.5,48.05 130.04,47.51 130.04,46.8 128.46,45.23 128.46,42.45 C1_BAT2.2 128.53,42.45 128.67,42.31 v129.22,42.31 | J3.2 164.47,18.7 164.95,18.7 165.47,19.22 165.47,20.99 165.22,21.24 165.18,21.24 v144.11,42.31 | 10.66,101.87 8.93,101.87 7.89,100.83 6.79,100.83 C9.1 | v16.48,107.68 20.43,107.68 R_RESET.1 | v11.36,102.56 10.73,101.94 R10.2 | J4.P4 5.68,90.58 6.27,90.58 6.84,91.15 6.84,91.26 v10.25,94.67 | 46.85,101.67 47.16,101.36 52.5,101.36 52.8,101.66 53.28,102.14 53.28,107.24 53.18,107.34 52.77,107.75 R_BOOT.1 | IC2.2 47.58,103.11 47.24,103.11 46.85,102.73 46.85,101.84 32.48,87.46 v31.09,87.46 | 60.11,107.75 53.67,107.75 53.25,107.34 | 89.06,61.7 89.06,60.59 93.76,55.88 93.76,53.25 R2_PINH1.2 | 90.36,63.22 90.06,63.22 89.06,62.22 89.06,61.77
  Top 0.305: 90.36,63.22 90.75,63.22 92.68,61.29 93.69,61.29 R1_PINH1.2 | 89.54,66.55 89.54,65.3 90.36,64.48 90.36,63.22 | v89.61,90.79 89.61,94.04 TP16.TP | v90.03,67.45 90.03,67.1 89.54,66.62 | v63.5,104.43 60.18,107.75 R_CHANGE.1 | v115.65,43.49 116.55,43.49 | 76.73,30.53 71.98,30.53 R9.2
  Bottom 0.15: v36.84,50.14 36.6,50.38 | 11.36,102.49 v11.36,102.56 | 89.54,90.79 v89.61,90.79 | 90.09,67.45 v90.03,67.45
  Bottom 0.3: v51.88,38.11 53.48,36.51 57.65,36.51 58.18,37.04 v58.31,37.12
  Bottom 0.305: v58.31,37.12 v65.86,29.57 | v11.63,46.74 v18.14,46.74 23.04,46.74 24.21,47.92 32.06,47.92 32.41,48.27 32.41,49.44 32.2,49.65 32.2,49.93 32.65,50.38 36.6,50.38 | v36.84,50.14 v36.84,46.88 | v129.22,42.31 v144.11,42.31 | v11.36,102.56 v16.48,107.68 | 11.36,102.49 10.25,101.38 v10.25,94.67 23.89,94.67 v31.09,87.46 | v89.61,90.79 89.61,67.86 v90.03,67.45 | v63.5,104.43 75.9,104.43 89.54,90.79 | 103.63,55.5 100.47,58.66 100.47,59.13 92.98,66.63 90.92,66.63 90.09,67.45 | 103.63,55.5 v115.65,43.49 | 103.63,55.5 v100.34,52.22
32KHZ
  Top 0.15: U2.9 17.94,49.44 17.94,47.16 17.66,46.88 17.66,45.91 27.21,36.36 45.91,36.36 45.98,36.29 47.37,36.29 48.27,37.19 51.31,37.19 52.28,36.22 60.94,36.22 73.2,48.48 91.48,48.48 93.76,50.76 93.76,51.87 R2_PINH1.1 93.83,51.94 93.83,52.15 94.46,52.77 94.46,55.69 90.3,59.85 90.3,61.75 U3.1
DN
  Top 0.15: 164.19,54.36 164.4,54.15 164.4,53.67 164.19,53.46 163.64,53.46 J2.B7 | 164.19,54.36 163.64,54.36 J2.A7 | D1.1 148.89,56.78 149.65,56.78 151.38,58.52 162.53,58.52 163.15,57.89 164.75,57.89 165.3,57.34 165.3,55.54 164.19,54.43 164.19,54.36
DP
  Top 0.15: 162.81,54.29 162.81,54.64 163.01,54.85 163.57,54.85 J2.B6 | 162.81,54.29 162.81,54.15 163.01,53.95 163.57,53.95 J2.A6 | 162.81,54.29 150.13,54.29 149.65,54.78 148.89,54.78 D1.3
EPD_3V3  (via drill 0.3)
  Top 0.15: TP17.TP 89.54,89.4 | 84.9,32.41 L1.2 84.9,32.34 | v79.66,27.82 v79.66,27.81
  Top 0.305: v83.24,16.2 83.24,15.44 J1.16 | C7.1 80.12,26.18 v80.81,26.87 80.81,27.54 84.9,31.63 84.9,32.34 | 89.54,89.4 89.54,86.98 90.03,86.49 90.14,86.49 91.3,85.32 91.3,71.64 86.98,67.31 86.9,67.31 86.67,67.08 86.67,63.19 86.8,63.06 86.85,63.06 87.15,62.77 87.15,53.77 v87.05,53.67 | 84.9,32.41 87.05,34.56 v87.05,34.58 | v79.66,27.81 Q2.2
  Bottom 0.305: v83.24,16.2 83.52,16.2 83.58,16.14 83.86,16.14 84.97,17.24 84.97,22.71 v80.81,26.87 80.61,26.87 v79.66,27.82 | v87.05,34.58 v87.05,53.67
EPD_3V3_C  (via drill 0.3)
  Top 0.15: 73.27,29.5 R_CL1.2 73.2,29.43 | 31.39,1.08 31.5,1.08
  Top 0.305: 73.27,29.5 75.97,29.5 Q2.1 | v5.26,72.71 5.26,68.49 6.36,67.39 6.41,67.39 6.65,67.16 6.65,7.93 13.5,1.08 17.07,1.08 18.28,2.29 TP13.TP 18.35,2.29 19.56,1.08 31.39,1.08 | U2.18 20.5,67.03 20.5,67.36 19.84,68.02 19.79,68.02 v15.44,72.37 | 73.2,29.43 72.3,29.43 71.74,28.88 71.59,28.88 71.58,28.89 70.44,28.89 70.36,28.8 59.22,28.8 31.5,1.08
  Bottom 0.305: v15.44,72.37 5.61,72.37 v5.26,72.71
EPD_BUSY  (via drill 0.3)
  Top 0.15: v86.77,16.48 86.77,15.44 J1.9 | v45.22,102.84 10.39,68 10.39,67.03 U2.26 | v70.64,102.84 75.28,107.48 TP9.TP 75.34,107.55 76.31,108.52 86.15,108.52 91.66,103 91.66,67.2 99.77,59.09 v99.77,58.79
  Bottom 0.15: v86.77,16.48 86.77,18.35 99.79,31.37 99.79,58.77 v99.77,58.79 | v70.64,102.84 v45.22,102.84
EPD_CS  (via drill 0.3)
  Top 0.15: 84.87,16.79 85.18,16.48 85.18,15.44 J1.12 | v72.57,24.45 72.57,25 72.37,25.21 D6.1 72.27,25.21 56.96,25.21 v56.8,25.05 | R9.1 71.05,28.25 71.65,27.65 v71.74,27.65 | v45.01,36.84 32.96,36.84 20.57,49.24 20.57,49.44 U2.11 | v126.24,57.2 133.79,64.75 157.34,64.75 TP10.TP | v87.25,18.21 86.28,18.21 84.87,16.79 | v82.96,17.11 83.51,17.11 83.55,17.14 84.52,17.14 84.87,16.79
  Bottom 0.15: v82.96,17.11 81.99,17.11 74.65,24.45 v72.57,24.45 72.57,24.52 71.74,25.35 v71.74,27.65 | v126.24,57.2 121.88,57.2 116.13,51.45 116.13,43.35 94.11,21.33 90.37,21.33 v87.25,18.21 | v56.8,25.05 v45.01,36.84
EPD_DC  (via drill 0.3)
  Top 0.15: v89.06,83.93 89.06,84.69 89.54,85.18 TP11.TP | v12.95,53.46 12.95,49.51 U2.5 | J1.11 85.73,15.4 85.73,16.95 v85.75,16.97
  Bottom 0.15: 89.09,67.76 89.06,67.8 v89.06,83.93 | 89.09,67.76 99.51,57.34 99.51,31.51 85.75,17.75 v85.75,16.97 | v12.95,53.46 22.92,63.43 84.76,63.43 89.09,67.76
EPD_RST  (via drill 0.3)
  Top 0.15: v90.51,20.84 86.28,16.62 86.28,15.44 J1.10 | v133.44,56.78 144.04,56.78 148.82,61.56 157.54,61.56 TP12.TP | v22.64,59.83 16.76,65.72 16.76,66.97 U2.21 | v30.26,52.22 32.69,49.79 v32.78,49.79
  Bottom 0.15: v133.44,56.78 132.2,55.54 132.2,55.26 132.34,55.12 132.34,49.51 103.67,20.84 v90.51,20.84 90.51,14.54 88.78,12.81 63.99,12.81 62.6,14.2 62.6,19.86 32.78,49.68 v32.78,49.79 | v30.26,52.22 v22.64,59.83
FLASH_CS
  Top 0.15: 56.58,37.6 57.2,36.98 57.2,36.84 R5.1 | 56.58,37.6 56.58,40.86 56.99,41.27 D9.1 | U1.1 35.46,60.73 29.85,60.73 25.48,56.37 22.3,56.37 21.81,55.88 21.81,49.51 U2.12 21.81,49.44 21.81,49.03 33.24,37.6 56.58,37.6
GDR  (via drill 0.3)
  Top 0.15: v89.54,14.2 90.16,14.82 90.16,15.37 J1.2 | v63.09,14.34 63.09,14.47 62.53,15.03 R4.1 62.53,15.1 62.74,15.3 62.74,18.7 Q3.1
  Bottom 0.15: v89.54,14.2 88.43,13.09 64.33,13.09 v63.09,14.34
GND  (via drill 0.3)
  Top 0.15: TP5.TP 2.84,25.55 2.84,30.47 TP4.TP 2.84,30.54 2.84,32.62 6.14,35.92 v6.14,48.68 | U2.29_1 12.33,55.54 12.33,56.72 U2.29_2 12.4,56.72 13.5,56.72 U2.29_5 | U2.29_1 12.4,55.54 13.5,55.54 U2.29_4 13.57,55.54 14.75,55.54 U2.29_7 14.82,55.54 14.82,56.72 U2.29_8 14.82,56.78 14.82,57.96 U2.29_9 14.75,58.03 13.57,58.03 U2.29_6 13.5,58.03 12.33,58.03 U2.29_3 12.33,58.1 7.89,62.53 7.89,66.97 U2.28 7.89,67.03 7.89,77.08 16.2,85.39 J4.G1 16.27,85.45 16.27,86.49 17.04,87.25 17.04,90.3 16.27,91.06 J4.G2 16.27,91.13 17.04,91.89 17.04,94.94 16.34,95.63 16.34,99.93 D8.2 16.27,100 16.07,100 14.89,101.17 8.74,101.17 7.77,100.2 6.09,100.2 5.58,100.72 | v11.15,53.74 7.89,50.48 7.89,49.51 U2.1 | v12.12,54.71 12.12,55.33 12.26,55.47 U2.29_1 | C10.2 67.59,109.14 66.83,109.14 65.72,108.03 CHANGE_BUTTON.2 65.65,108.1 62.26,108.1 CHANGE_BUTTON.1 62.19,108.1 60.94,108.1 60.66,108.38 51.24,108.38 50.9,108.03 BOOT_BUTTON.2 | BOOT_BUTTON.2 50.76,108.1 47.3,108.1 BOOT_BUTTON.1 47.23,108.03 46.26,108.03 v46.19,107.96 | 50.83,104.64 51.66,104.64 52.42,103.88 C_DELAY.2 | 50.83,104.64 49.86,104.64 49.72,104.5 49.72,104.22 47.78,102.28 47.64,102.28 IC2.3 | 50.83,104.64 50.83,108.03 BOOT_BUTTON.2 | 5.58,100.72 2.98,98.13 2.98,95.63 J4.G4 2.98,95.5 2.98,95.22 5.47,92.73 J4.P6 5.4,92.73 2.01,89.33 2.01,82.48 J4.G3 | 5.58,100.72 6.72,101.87 6.72,102.08 C9.2 6.79,102.14 7.69,103.04 16.9,103.04 21.95,108.1 22.23,108.1 RESET_BUTTON.1 22.37,108.1 25.76,108.1 RESET_BUTTON.2 25.83,108.1 26.94,109.21 27.7,109.21 C5.2 27.7,109.14 45.36,109.14 C6.2 45.36,109.21 v46.19,109.21
  Top 0.15: C1.2 155.26,7.2 153.53,7.2 C2.2 153.53,7.27 153.53,10.32 152.77,11.08 152.77,11.15 | 152.77,11.15 152.07,11.15 151.66,11.56 151.66,11.84 SENSOR2.7 151.59,11.91 151.59,12.88 150.83,13.64 150.83,14.75 SENSOR2.1 | 152.77,11.15 153.18,11.56 153.18,11.84 SENSOR2.5 153.25,11.91 159,17.66 164.4,17.66 J3.1 164.47,17.73 164.81,17.73 165.85,18.76 165.85,49.1 | 151.24,50.9 151.24,52.01 151.38,52.15 C4_USB.2 | 151.24,50.9 151.24,49.79 C5_USB.2 | J2.A1 163.64,50.83 163.64,51.11 J2.B12 | J2.A1 163.64,50.76 163.64,49.58 164.12,49.1 J2.MP3 164.19,49.1 165.85,49.1 | 151.24,50.9 163.57,50.9 J2.A1 | 165.85,49.1 168.07,49.1 J2.MP1 168.07,49.17 168.07,59.21 J2.MP2 168.07,59.28 164.19,59.28 J2.MP4 164.12,59.21 153.8,59.21 R2-USB.2 153.74,59.14 150,59.14 148.51,57.65 | SJ1.1 62.19,12.74 62.19,12.95 62.95,13.71 63.09,13.71 63.78,14.4 R4.2 63.85,15.1 66.89,18.14 66.89,18.97 R2.1 66.97,19.04 66.97,21.47 EPD_C2.1 66.69,21.54 69.04,21.54 EPD_C1.1 69.11,21.54 70.29,21.54 73.89,25.14 D6.2 73.89,25.21 75.83,25.21 77.77,23.27 77.84,23.27 | J1.8 87.25,15.44 87.25,16.97 91,20.71 91,20.98 90.44,21.54 89.89,21.54 EPD_C12.1 89.82,21.54 88.36,21.54 EPD_C11.1 88.29,21.54 86.7,21.54 EPD_C10.1 86.56,21.54 85.04,21.54 EPD_C9.1 84.97,21.54 83.45,21.54 EPD_C8.1 83.38,21.47 v82.68,20.77 82.48,20.57 82.48,16.97 82.68,16.76 82.68,15.44 J1.17 | 78.94,16 78.25,15.3 78.25,12.95 J1.MP2 78.32,12.95 91.69,12.95 J1.MP1 | 78.94,16 79.5,16 79.71,15.79 79.71,15.44 J1.23 | 78.53,20.77 78.53,16.48 78.94,16.07 78.94,16 | 78.53,20.77 78.53,21.54 EPD_C5.1 78.46,21.61 77.84,22.23 77.84,23.27
  Top 0.15: v80.33,20.77 80.12,20.98 80.12,21.47 EPD_C6.1 | 78.53,20.77 v78.94,20.77 | 77.84,23.27 77.97,23.41 78.53,23.41 81.23,26.11 81.37,26.11 C7.2 81.44,26.11 84.48,26.11 85.25,25.35 | v81.65,20.77 81.65,21.47 EPD_C7.1 | 85.25,25.35 87.74,22.85 88.29,22.85 EPD_C11.2 | 85.25,25.35 90.51,30.61 D3.1 90.58,30.61 92.8,30.61 93.42,29.98 95.15,29.98 98.88,33.72 98.97,33.72 105.76,40.51 107.75,40.51 | 37.53,56.99 35.52,56.99 U1.4 35.46,56.92 35.04,56.51 v35.04,56.37 | 37.53,56.99 39.33,58.79 U1.9 | 37.53,56.99 37.53,56.92 38.57,55.88 38.57,50.34 D12.2 38.64,50.28 45.64,43.28 46.26,43.28 D11.2 46.33,43.21 52.08,43.21 52.35,42.94 D10.2 52.42,42.87 56.99,42.87 D9.2 57.06,42.87 67.17,42.87 75.48,51.18 85.52,51.18 86.42,52.08 U3.13 86.49,52.42 86.49,52.08 v88.57,50 | C2_BAT.2 109.48,53.81 111.84,53.81 112.48,54.45 115.26,54.45 116.67,53.05 120.63,53.05 MCP73831.2 120.7,52.98 120.91,52.98 121.53,52.35 121.53,51.04 118.21,47.71 R2_BAT.1 118.07,47.64 118.07,46.67 114.85,43.45 | 107.75,40.51 110.94,37.33 111.84,37.33 112.46,37.95 112.67,37.95 C1_BAT1.2 112.74,38.02 114.12,38.02 117.24,41.13 122.57,41.13 C3.- 122.64,41.13 C1_BAT2.1 128.46,41.2 128.74,41.2 131.37,43.84 131.37,53.53 U4.4 131.44,53.6 131.71,53.6 132.41,54.29 U4.9 | 107.75,40.51 107.75,41.34 R1_PWRUSB.1 107.82,41.41 109.9,41.41 110.87,42.38 111.63,42.38 113.22,43.97 114.33,43.97 114.85,43.45 | 114.85,43.45 113.92,42.52 113.78,42.52 IC4.2 | v94.94,54.22 97.16,54.22 C10_SUPERCAP.1 97.23,54.29 107.61,54.29 109.48,56.16 123.75,56.16 C1_BAT.2 123.82,56.16 130.33,56.16 131.37,55.12 U4.1 131.44,55.05 131.71,55.05 132.41,54.36 U4.9
  Top 0.15: U4.9 132.47,54.29 132.68,54.08 133.31,54.08 U4.6 133.38,54.08 142.86,54.08 145.49,56.72 R2-USB1.2 145.56,56.78 147.64,56.78 148.51,57.65 | J2.A12 163.64,57.48 163.64,57.27 J2.B1 163.57,57.2 v158.44,57.2 | v150.34,55.82 151.31,55.82 D1.5 | 148.51,57.65 v148.68,57.48 | C8.2 91.01,49.15 90.22,49.94 v90.22,49.96
  Bottom 0.15: v12.12,54.71 v11.15,53.74 11.15,53.67 9.59,52.11 | 9.59,52.11 6.16,48.68 v6.14,48.68 | v46.19,109.21 v46.19,107.96 | v78.94,20.77 v80.33,20.77 v81.65,20.77 v82.68,20.77 | v88.57,50 90.16,50 | v94.94,54.22 94.46,54.22 90.23,50 90.16,50 | v148.68,57.48 v150.34,55.82 150.41,55.82 151.8,57.2 v158.44,57.2 | 9.59,52.11 10.18,51.52 30.19,51.52 v35.04,56.37 | 90.16,50 90.18,50 v90.22,49.96
  pour Top: 170.05,0.15 170.05,67.05 92.17,67.05 92.11,67.07 92.07,67.11 92.05,67.17 92.05,111.05 0.25,111.05 0.25,0.15 75.85,0.15 75.85,10.03 75.87,10.09 75.91,10.13 75.97,10.15 94.23,10.15 94.29,10.13 94.33,10.09 94.35,10.03 94.35,0.15
  pour Bottom: 170.05,0.15 170.05,67.05 92.17,67.05 92.11,67.07 92.07,67.11 92.05,67.17 92.05,111.05 0.25,111.05 0.25,0.15 75.85,0.15 75.85,10.03 75.87,10.09 75.91,10.13 75.97,10.15 94.23,10.15 94.29,10.13 94.33,10.09 94.35,10.03 94.35,0.15
GPIO8
  Top 0.15: R1.1 19.32,45.5 19.32,45.7 19.94,46.33 19.94,48.54 19.32,49.17 19.32,49.44 U2.10
I2C_PW  (via drill 0.3)
  Top 0.15: C1.1 155.26,5.89 153.53,5.89 C2.1 153.46,5.89 152.9,5.89 151.73,7.06 R1_PINH.2 151.66,7.13 150.83,7.13 | 150.83,7.13 149.79,7.13 R2-PINH.2 | 150.83,7.13 150.83,11.84 SENSOR2.8 150.76,11.91 150.76,13.3 150.34,13.71 150.34,15.37 150.79,15.82 | SENSOR2.6 152.35,11.91 152.35,13.02 151.66,13.71 151.66,14.75 SENSOR2.2 151.59,14.82 151.59,15.03 150.79,15.82 | v22.78,60.45 22.78,62.33 21.81,63.29 21.81,66.97 U2.17 | v99.03,33.24 133.38,33.24 150.79,15.82
  Bottom 0.15: v22.78,60.45 22.99,60.45 25.41,58.03 43.49,58.03 63.57,37.95 63.57,33.93 64.26,33.24 v99.03,33.24
INT_RTC  (via drill 0.3)
  Top 0.15: 88.71,65.03 88.71,66.97 89.68,67.93 90.16,67.93 94.46,63.64 94.46,60.8 93.76,60.11 93.76,59.97 R1_PINH1.1 | U3.3 87.81,61.77 87.81,62.71 88.71,63.61 88.71,65.03 | TP15.TP 14.06,2.42 16.69,5.05 16.69,49.44 U2.8 16.76,49.51 16.76,49.79 18.07,51.11 18.07,53.05 23.13,58.1 26.8,58.1 29.92,61.22 v30.12,61.22 | v87.95,65.03 88.71,65.03
  Bottom 0.15: v87.95,65.03 86.77,65.03 82.96,61.22 v30.12,61.22
IO/BOOT
  Top 0.15: R_BOOT.2 52.7,109.14 51.24,109.14 50.83,109.55 BOOT_BUTTON.3 50.76,109.62 47.3,109.62 BOOT_BUTTON.4 47.23,109.62 45.43,107.82 C6.1 45.43,107.75 45.7,107.48 45.7,102.7 24.38,81.37 24.38,67.03 U2.15
IO/CHANGE  (via drill 0.3)
  Top 0.15: R_CHANGE.2 60.18,109.14 61.77,109.14 62.19,109.55 CHANGE_BUTTON.4 62.26,109.62 65.65,109.62 CHANGE_BUTTON.3 65.72,109.62 65.86,109.76 68.14,109.76 68.28,109.62 68.28,108.72 67.66,108.1 67.66,107.89 C10.1 67.59,107.82 29.85,70.08 v27.84,70.08 | U2.23 14.2,67.03 14.2,67.24 v17.02,70.07
  Bottom 0.15: v27.84,70.08 17.04,70.08 v17.02,70.07
MISO  (via drill 0.3)
  Top 0.15: D12.1 38.43,48.96 36.01,48.96 R8.1 35.94,49.03 34.28,50.69 34.18,50.59 | U1.2 35.46,59.49 35.46,59.14 34.1,57.78 34.1,55.78 34.18,55.71 34.18,50.59 | v9.07,77.63 9.07,67.03 U2.27 9.07,66.97 9.07,66.69 8.38,66 v8.38,65.86 | v6.79,93 6.03,93.76 5.82,93.76 J4.P7 | v2.91,24.1 2.91,21.19 TP6.TP | 34.18,50.59 33.21,49.62 33.21,49.61 32.9,49.31 32.83,49.31 31.96,48.44 v31.87,48.44
  Bottom 0.15: v9.07,77.63 9.07,90.72 v6.79,93 | 2.91,48.2 2.91,60.39 v8.38,65.86 | 2.91,48.2 v2.91,24.1 | 2.91,48.2 6.3,48.2 6.51,48.41 31.83,48.41 v31.87,48.44
MOSI  (via drill 0.3)
  Top 0.15: v81.78,14.61 83.79,14.61 84.21,15.03 84.21,15.37 J1.14 | v47.3,36.84 46.54,36.84 R7.1 | v43.35,46.19 43.35,56.92 U1.5 43.42,56.92 70.64,56.92 90.95,77.24 90.95,81.52 90.06,82.41 89.96,82.41 85.73,86.63 85.73,107.27 TP7.TP | U2.7 15.51,49.51 15.51,49.79 v16.34,50.62 16.27,50.62 v16.27,58.59 | J4.P3 5.75,89.4 5.75,89.26 4.78,88.29 4.78,70.1 v4.76,70.08 | v44.5,39.93 D11.1
  Bottom 0.15: v81.78,14.61 69.53,14.61 v47.3,36.84 47.3,36.91 44.35,39.85 | 44.35,39.85 43.35,40.86 v43.35,46.19 43.28,46.19 38.74,50.73 32.5,50.73 32.39,50.62 v16.34,50.62 | 44.35,39.85 44.39,39.89 44.46,39.89 v44.5,39.93 | v16.27,58.59 4.78,70.08 v4.76,70.08
N$1
  Top 0.15: R2-USB.1 153.8,57.89 157.13,57.89 159.07,55.95 163.57,55.95 J2.B5
N$2  (via drill 0.3)
  Top 0.15: v147.64,53.32 145.56,55.4 R2-USB1.1 | v162.67,53.32 163.01,52.98 163.57,52.98 J2.A5
  Bottom 0.15: v162.67,53.32 v147.64,53.32
N$3
  Top 0.15: 111.35,40.23 111.35,38.02 C1_BAT1.1 | 111.35,40.23 110.66,40.93 D2.1 | 113.22,41.97 113.29,41.97 113.71,41.55 IC4.3 113.85,41.55 113.92,41.55 114.82,42.45 124.16,42.45 128.87,47.16 128.94,47.16 Q1.2 | 113.22,41.97 113.08,42.1 113.08,42.87 113.71,43.49 IC4.1 | 111.35,40.23 111.42,40.23 113.15,41.97 113.22,41.97
N$4
  Top 0.15: R1_BAT.1 112.81,52.01 112.81,51.42 113.39,50.84 114.76,50.84 116.48,52.56 119.94,52.56 120.43,52.08 120.63,52.08 MCP73831.1
N$5
  Top 0.15: C4.1 97.5,34.97 94.53,34.97 94.04,34.49 D4.1 94.04,34.42 94.04,30.68 D3.2
N$6
  Top 0.15: CHG_LED.C 113.02,53.81 114.06,52.77 114.06,52.08 R1_BAT.2
N$7
  Top 0.15: R2_BAT.2 118.14,49.03 118.14,52.01 MCP73831.5
N$8  (via drill 0.3)
  Top 0.15: v88.78,16.2 89.19,15.79 89.19,15.44 J1.4 | v69.73,22.16 69.11,22.78 EPD_C1.2
  Bottom 0.15: v88.78,16.2 87.12,16.2 86.63,15.72 82.96,15.72 78.67,20.01 71.88,20.01 v69.73,22.16
N$9  (via drill 0.3)
  Top 0.15: v84.48,14.61 88.29,14.61 88.71,15.03 88.71,15.37 J1.5 | v67.38,22.16 66.69,22.85 EPD_C2.2
  Bottom 0.15: v84.48,14.61 83.65,14.61 78.81,19.46 70.08,19.46 v67.38,22.16
N$10  (via drill 0.3)
  Top 0.15: v81.78,24.17 79.84,24.17 78.53,22.85 EPD_C5.2 | J1.15 v83.72,16.71
  Bottom 0.15: v81.78,24.17 83.72,22.23 v83.72,16.71
N$11
  Top 0.15: J1.18 82.2,15.44 82.2,20.91 82.68,21.4 82.68,21.88 83.03,22.23 83.93,22.23 84.07,22.37 84.07,23.27 83.93,23.41 80.68,23.41 80.12,22.85 EPD_C6.2
N$12  (via drill 0.3)
  Top 0.15: v81.72,18.21 81.72,15.44 J1.19 | v82.55,22.78 81.72,22.78 EPD_C7.2
  Bottom 0.15: v81.72,18.21 83.17,19.67 83.17,22.16 v82.55,22.78
N$13
  Top 0.15: J1.20 81.16,15.44 81.16,20.91 81.02,21.05 81.02,21.95 81.3,22.23 82.61,22.23 83.17,22.78 83.38,22.78 EPD_C8.2
N$14
  Top 0.15: J1.21 80.75,15.37 80.75,15.03 82.06,13.71 90.16,13.71 91.27,14.82 91.27,21.26 90.3,22.23 85.59,22.23 85.04,22.78 EPD_C9.2
N$15
  Top 0.15: J1.22 80.19,15.44 80.19,20.29 79.43,21.05 79.43,23.27 79.84,23.68 85.73,23.68 86.56,22.85 EPD_C10.2
N$16
  Top 0.15: C_DELAY.1 52.42,102.56 52.01,102.56 50.48,104.08 IC2.5
N$17
  Top 0.15: D7.1 87.46,66.55 87.46,64.82 88.09,64.19 R_CAPACITOR.1
N$18
  Top 0.15: J1.24 79.22,15.37 79.22,15.03 80.81,13.43 90.3,13.43 91.55,14.68 91.55,21.74 90.51,22.78 89.89,22.78 EPD_C12.2
RESE  (via drill 0.3)
  Top 0.15: v88.92,14.2 89.68,14.96 89.68,15.37 J1.3 | v67.03,13.57 66.48,13.57 66.2,13.3 R3.1 66.13,13.23 64.54,11.63 61.49,11.63 61.29,11.84 61.29,18.28 62.46,19.46 63.09,19.46 63.78,18.77 64.06,18.77 Q3.2
  Bottom 0.15: v88.92,14.2 84.69,14.2 84.07,13.57 v67.03,13.57
RESE`
  Top 0.15: SJ1.2 63.71,12.74 65.51,14.54 66.13,14.54 R3.2 66.2,14.61 68.14,16.55 68.14,18.97 R2.2
RESET  (via drill 0.3)
  Top 0.15: R_RESET.2 20.5,109.07 21.81,109.07 22.3,109.55 RESET_BUTTON.4 22.37,109.62 25.76,109.62 RESET_BUTTON.3 25.83,109.62 25.9,109.69 v26.87,109.69 | v27.01,108.65 27.7,107.96 C5.1 | v46.19,104.15 47.58,104.15 IC2.1 | v10.39,52.01 10.39,49.51 U2.3
  Bottom 0.15: v26.87,109.69 27.01,109.55 v27.01,108.65 27.08,108.65 31.58,104.15 | 31.58,104.15 v46.19,104.15 | v10.39,52.01 31.58,73.2 31.58,104.15
RTC_RST  (via drill 0.3)
  Top 0.15: v25.9,63.92 23.13,66.69 23.13,66.97 U2.16 | v84.62,63.92 86.42,62.12 86.42,61.77 U3.4
  Bottom 0.15: v84.62,63.92 v25.9,63.92
RX
  Top 0.15: U2.24 12.95,66.97 12.95,66.69 17.17,62.46 19.39,62.46 22.51,59.35 27.21,59.35 50,82.13 89.95,82.13 90.67,81.41 90.67,78.69 TP2.TP
SCK  (via drill 0.3)
  Top 0.15: v53.6,37.12 53.05,37.12 52.84,36.91 R6.1 | v43.35,57.55 43.35,58.17 U1.6 43.35,58.24 v49.51,64.4 | v51.38,40.44 52.35,41.41 D10.1 | U2.6 14.2,49.51 14.2,49.72 v15.51,51.04 v15.51,59.97 | v4.71,91.27 5.05,91.62 5.75,91.62 J4.P5 | v80.12,95.01 80.12,107.27 TP8.TP | v84.74,16.3 84.72,16.28 J1.13
  Bottom 0.15: 54.08,37.6 58.45,37.6 63.09,32.96 79.64,32.96 85.32,27.28 85.32,17.1 84.74,16.51 v84.74,16.3 | v53.6,37.12 54.08,37.6 | 43.35,51.11 43.35,48.41 51.35,40.41 | 43.35,51.11 v43.35,57.55 | 51.35,40.41 54.08,37.67 54.08,37.6 | v51.38,40.44 51.35,40.41 | v15.51,51.04 16.14,51.04 16.2,51.11 43.35,51.11 | v4.71,91.27 4.71,70.77 v15.51,59.97 | v49.51,64.4 v80.12,95.01
SCL  (via drill 0.3)
  Top 0.15: v150.83,5.89 149.79,5.89 R2-PINH.1 | v152.84,13.85 152.84,14.13 153.18,14.47 153.18,14.75 SENSOR2.4 153.25,14.82 159.07,20.64 164.4,20.64 J3.4 | 134,54.91 133.72,54.64 133.38,54.64 U4.7 | 134,54.91 134,55.26 132.54,56.72 126.1,56.72 125.55,57.27 v96.33,57.27 | v22.3,61.56 18,65.86 18,66.97 U2.20 | 134,54.91 v134.69,54.91 | U3.16 90.34,52.49 91.53,52.49 v91.55,52.51
  Bottom 0.15: v150.83,5.89 150.97,5.89 152.84,7.76 v152.84,13.85 153.53,13.85 160.52,20.84 160.52,29.09 v134.69,54.91 | 91.55,52.49 v96.33,57.27 | v22.3,61.56 24.86,59 84.42,59 90.92,52.49 91.55,52.49 | v91.55,52.51 91.55,52.49
SDA  (via drill 0.3)
  Top 0.15: v150.97,6.51 151.03,6.51 151.66,5.89 R1_PINH.1 | SENSOR2.3 152.35,14.75 152.14,14.54 v152.14,13.85 152.21,13.85 152.7,13.37 152.97,13.37 159.21,19.6 164.4,19.6 J3.3 | v90.86,53.74 90.03,53.74 89.06,52.77 89.06,52.49 U3.15 | U4.8 133.31,55.12 132.96,55.12 v132.68,55.4 131.64,56.44 124.72,56.44 124.37,56.78 93.97,56.78 v93.94,56.82 | v22.3,62.19 19.32,65.16 19.32,66.97 U2.19
  Bottom 0.15: v150.97,6.51 150.97,12.67 v152.14,13.85 152.14,35.94 v132.68,55.4 | v22.3,62.19 28.53,62.19 31.44,59.28 85.25,59.28 90.79,53.74 v90.86,53.74 v93.94,56.82
SRC  (via drill 0.3)
  Top 0.15: v63.43,21.95 63.43,20.84 Q3.3 | v79.38,31.89 79.71,32.22 L1.1 80.5,32.47 80.5,33.14 84.54,37.18 D5.2 84.55,37.6 84.81,37.35 v85.52,37.35 | v86.49,36.34 97.52,36.34 C4.2
  Bottom 0.15: v63.43,21.95 73.37,31.89 v79.38,31.89 | v86.49,36.34 86.49,36.36 85.52,37.33 v85.52,37.35
SS_SD
  Top 0.15: D8.1 14.75,100 14.2,100.55 10.73,100.55 R10.1 10.73,100.48 10.73,92.86 6.23,88.36 J4.P2 6.23,88.29 7,87.52 7,63.01 11.63,58.38 11.63,49.51 U2.4
TX
  Top 0.15: U2.25 11.7,66.97 11.7,66.69 17.87,60.52 20.91,60.52 22.37,59.07 27.35,59.07 49.17,80.88 89.4,80.88 TP1.TP
USB_D+  (via drill 0.3)
  Top 0.15: v150.2,54.85 151.31,54.85 D1.4 | v36.84,35.87 61.01,35.87 73.2,48.06 91.48,48.06 92.53,49.11 95.99,49.11 100.07,53.18 106.58,53.18 v106.62,53.23 | U2.14 24.38,49.44 25.28,48.54 v25.28,47.41
  Bottom 0.15: v150.2,54.85 136.01,54.85 133.17,57.69 112.05,57.69 107.59,53.23 v106.62,53.23 | v25.28,47.41 25.3,47.41 v36.84,35.87
USB_D-  (via drill 0.3)
  Top 0.15: v150.27,56.78 151.31,56.78 D1.6 | v107.41,53.67 107.41,53.39 106.71,52.7 100,52.7 96.13,48.83 93.85,48.83 83.7,38.68 64.24,38.68 60.94,35.39 36.7,35.39 v36.22,35.87 | U2.13 23.13,49.44 23.13,49.17 24.65,47.64 v24.65,47.41
  Bottom 0.15: v150.27,56.78 150,56.78 148.82,57.96 111.7,57.96 v107.41,53.67 | v36.22,35.87 25.1,46.99 24.67,47.41 v24.65,47.41
VBAT  (via drill 0.3)
  Top 0.15: U4.3 131.37,54.08 131.37,54.57 U4.2 | 131.3,54.08 131.09,54.08 | 109.31,55.15 109.21,55.05 | MCP73831.3 120.63,53.95 | 2.7,34.76 TP3.TP
  Top 0.305: Q1.3 128.11,49.31 128.11,51.11 128.03,51.11 | U4.3 131.3,54.08 | v4.36,34.76 2.7,34.76 | 128.03,51.11 123.83,51.11 121.06,53.88 120.7,53.88 MCP73831.3 | 128.03,51.11 131.01,54.08 131.09,54.08 | v56.08,24.94 56.08,25.05 58.17,27.13 79.79,27.13 83.07,30.41 83.07,35.21 84.7,36.84 91.48,36.84 108.1,53.46 108.1,53.74 C2_BAT.1 108.24,53.81 108.24,54.41 108.88,55.05 109.21,55.05 | 109.31,55.15 109.56,55.41 119.17,55.41 120.63,53.95
  Bottom 0.305: v4.36,34.76 46.26,34.76 v56.08,24.94
VBUS  (via drill 0.3)
  Top 0.15: 150.06,52.15 149.93,52.01 | 149.93,49.79 C5_USB.1 | C4_USB.1 150.06,52.22 | 118.14,53.95 MCP73831.4 | 110.66,43.07 D2.2 | TP14.TP
  Top 0.305: 149.93,52.01 149.93,49.79 | 150.06,52.15 C4_USB.1 | 150.06,52.22 147.79,54.49 147.79,55.07 148.46,55.75 148.82,55.75 D1.2 | PFMF.050.1.2 151.38,43.35 149.93,44.8 149.93,49.72 C5_USB.1 149.86,49.65 v131.85,49.65 | v122.85,53.95 123.75,54.85 C1_BAT.1 | 118.14,53.95 v119.25,53.95 | v127.07,49.65 127.07,47.23 Q1.1 | 110.73,51.11 110.66,51.04 110.66,43.07 | 110.73,51.11 110.83,51.21 110.83,51.41 112.29,52.87 113.25,52.87 113.45,52.67 113.45,51.39 113.65,51.2 114.61,51.2 115.18,51.76 115.18,53.26 CHG_LED.A | D2.2 110.59,43 110.31,42.73 107.75,42.73 R1_PWRUSB.2 107.68,42.66 107.41,42.66 98.82,34.07 v98.61,34.07 | MCP73831.4 116.27,53.95 115.24,54.98 109.83,54.98 109.36,54.5 108.94,54.5 108.82,54.38 108.82,53.03 110.73,51.11 | TP14.TP 32.15,2.42 58.95,29.23 59.22,29.23 v64.06,34.07
  Bottom 0.15: 122.85,53.88 v122.85,53.95
  Bottom 0.305: v119.25,53.95 v122.85,53.95 | 122.85,53.88 v127.07,49.65 v131.85,49.65 | v98.61,34.07 v64.06,34.07
VRTC  (via drill 0.3)
  Top 0.15: 87.81,52.49 U3.14 87.81,52.42 | 89.75,50.21 89.68,50.21
  Top 0.305: 87.81,52.49 88.4,53.08 88.4,62.51 88.4,62.69 88.4,62.8 88.66,63.06 88.77,63.06 89.33,63.62 89.33,64.13 R_CAPACITOR.2 | 87.81,52.42 87.81,51.99 88.66,51.14 88.74,51.14 89.68,50.21 89.68,49.17 C8.1 | v94.6,52.01 97.16,52.01 C10_SUPERCAP.2 | v92.86,52.01 91.55,52.01 89.75,50.21
  Bottom 0.305: v92.86,52.01 v94.6,52.01
VUSB  (via drill 0.3)
  Top 0.15: 163.64,56.44 J2.B4 163.57,56.44 | 163.64,51.87 J2.B9
  Top 0.305: 163.64,56.44 163.64,56.65 J2.A9 | 163.64,51.87 163.64,51.66 J2.A4 | 162.08,51.94 153.17,51.94 152.16,52.94 150.97,52.94 150.73,52.7 150.73,51.6 150.58,51.45 150.58,46.99 150.62,46.95 150.72,46.95 152.65,45.02 152.65,41.62 152.21,41.17 149.06,41.17 146.95,43.28 PFMF.050.1.1 | 162.08,51.94 163.57,51.94 J2.B9 | v162.67,56.44 163.57,56.44 | v162.32,53.81 162.18,53.81 162.08,53.71 162.08,51.94
  Bottom 0.305: v162.67,56.44 162.67,54.15 v162.32,53.81

## Text on the board
tPlace: EPD_BUSY | MOSI | SCK | 3V3 | EPD_3V3 | EPD_DC | TX | RX | EPD_CS | EPD_RST | VBAT | GND | GND | MISO | EPD_3V3_C | VBUS | INT_RTC